# EAGLE board AS5048 Encoder (EAGLE 6.4)
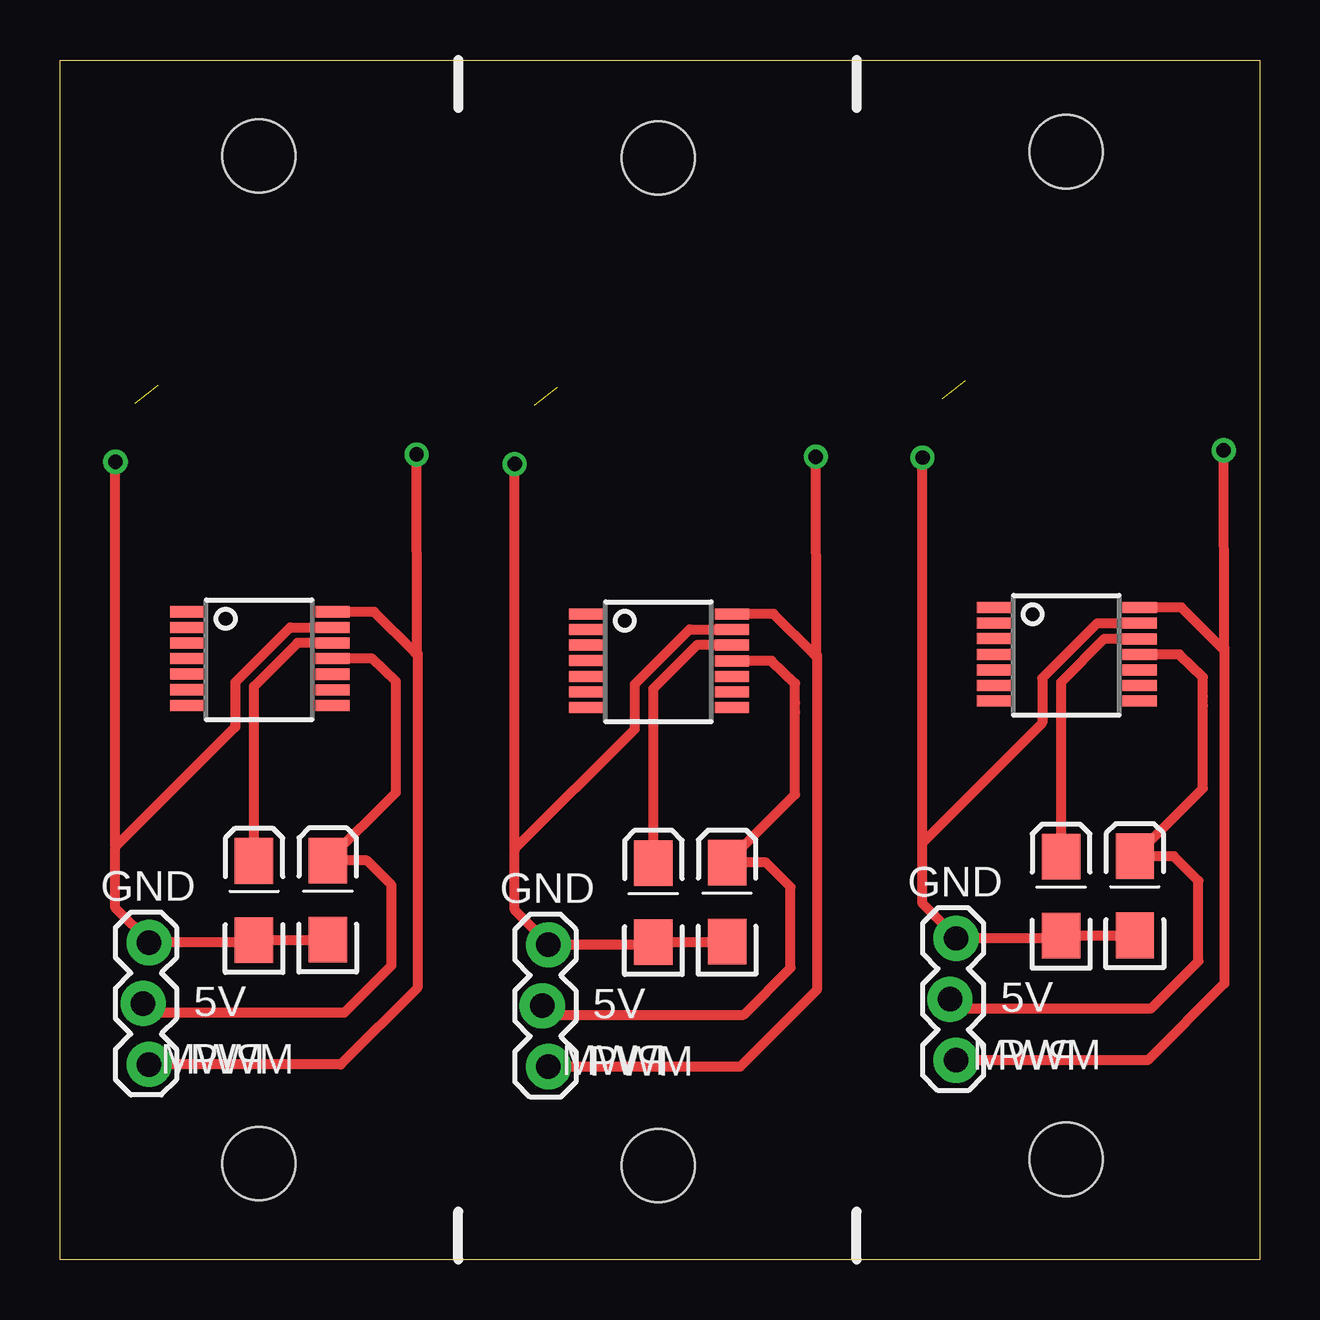
[diagram p0: board, top side]
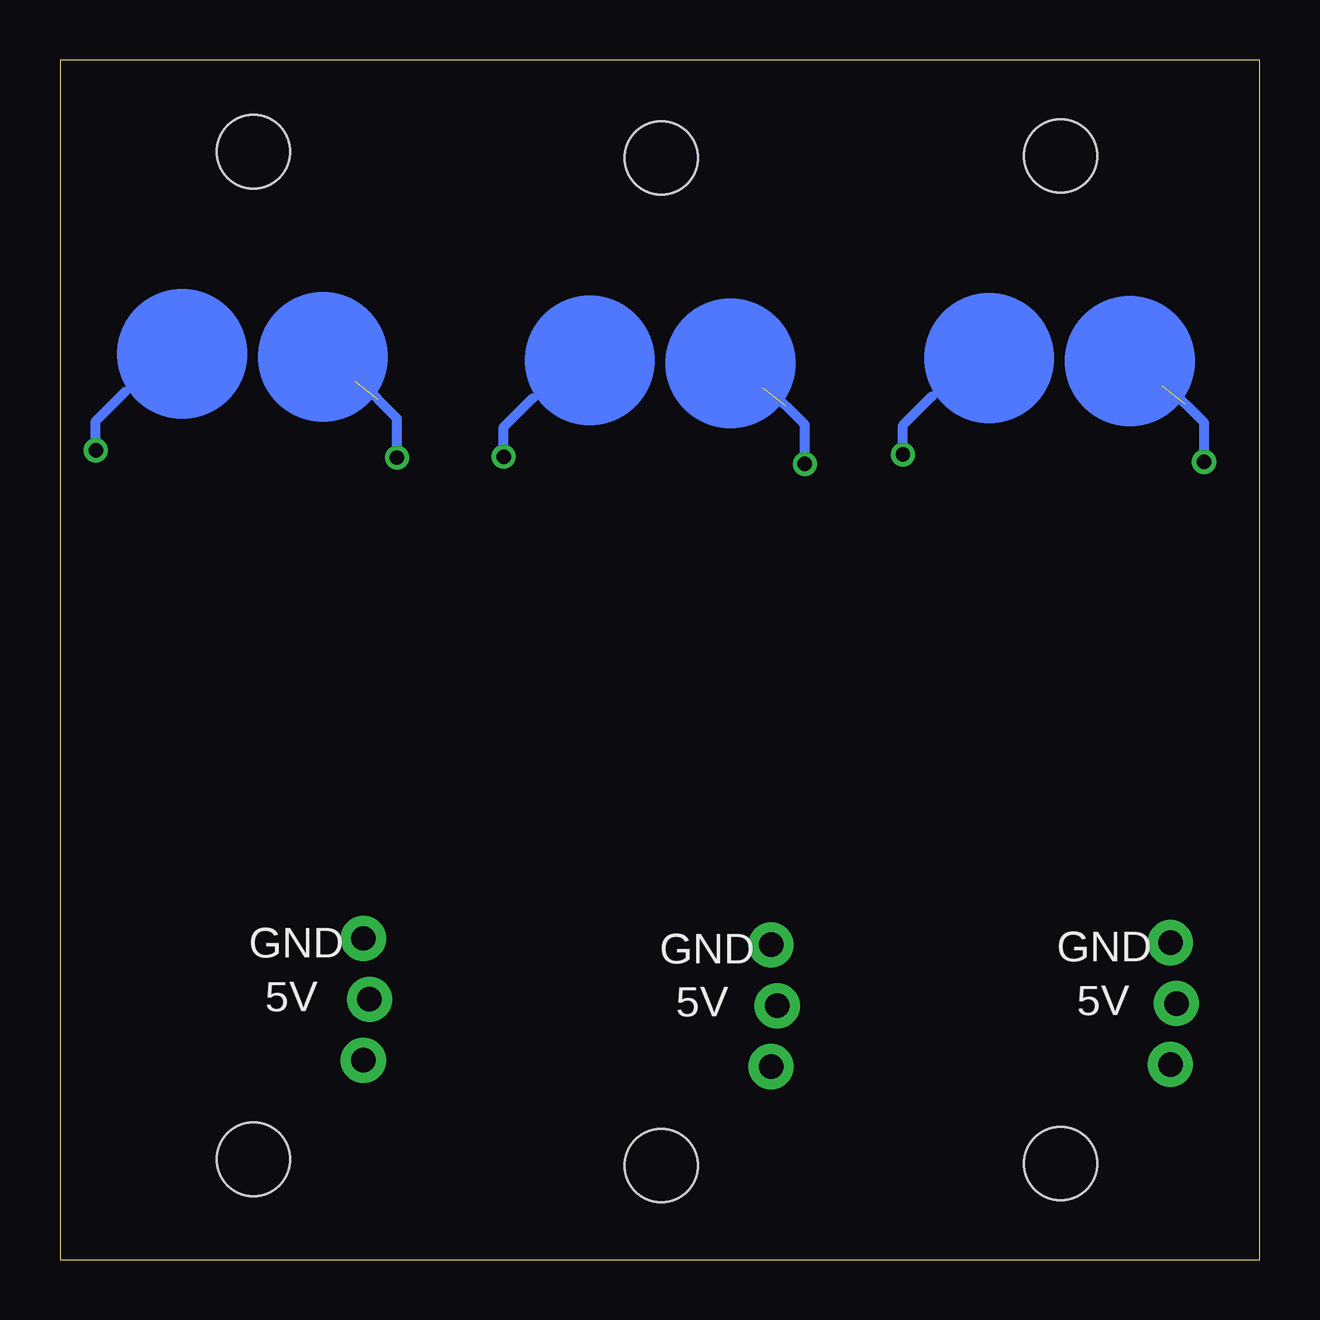
[diagram p1: board, bottom side, seen from below]

Size 50 x 50 mm. Coordinates in mm from the lower left corner, seen from the top.
Outline: 0,0 0,50 50,50 50,0 0,0
Copper layers (1*16): Top 0.035mm / dielectric 1.5mm / Bottom 0.035mm
Design rules "default": minimum track width 10mil, minimum drill 24mil, track to track 8mil, track to pad 8mil, pad to pad 8mil, via to via 8mil, smd to smd 8mil, copper to edge 40mil, drill to drill 8mil, minimum pad ring 10mil, minimum via ring 8mil, stop-mask expansion 4mil, vias tented up to drill 0mil, thermal gap 10mil

## Footprints (pad centres in the part's own frame; a part is rotated, then mirrored left to right if it is on the bottom)
EIA3216-KIT = smd 1.9 x 1.6: A 1.65,0; C -1.65,0
1X03_LOCK = drill 1.016 pad 1.88: 1 0,0.127; 2 2.54,-0.127; 3 5.08,0.127
TSOP14 = smd 0.46 x 1.43: 1 -2,-3; 2 -1.35,-3; 3 -0.7,-3; 4 -0.05,-3; 5 0.6,-3; 6 1.25,-3; 7 1.9,-3; 8 1.904,3.065; 9 1.254,3.065; 10 0.604,3.065; 11 -0.046,3.065; 12 -0.696,3.065; 13 -1.346,3.065; 14 -2,3.065
STAND-OFF-TIGHT = hole 3.048: 0,0

## Placement (x,y rotation side)
C1  100nF  [EIA3216-KIT]  27.81,14.89 90 top
C2  10uF  [EIA3216-KIT]  24.73,14.88 90 top
C3  100nF  [EIA3216-KIT]  11.16,14.98 90 top
C4  10uF  [EIA3216-KIT]  8.09,14.97 90 top
C5  100nF  [EIA3216-KIT]  44.8,15.16 90 top
C6  10uF  [EIA3216-KIT]  41.73,15.14 90 top
JP1  [1X03_LOCK]  3.59,13.21 270 top
JP2  [1X03_LOCK]  20.23,13.12 270 top
JP3  [1X03_LOCK]  37.23,13.39 270 top
U$1  AS5048  [TSOP14]  8.3,25 270 top
U$2  [STAND-OFF-TIGHT]  8.3,46 0 top
U$3  [STAND-OFF-TIGHT]  8.3,4 0 top
U$4  AS5048  [TSOP14]  24.94,24.91 270 top
U$5  [STAND-OFF-TIGHT]  24.94,45.91 0 top
U$6  [STAND-OFF-TIGHT]  24.94,3.91 0 top
U$7  AS5048  [TSOP14]  41.94,25.18 270 top
U$8  [STAND-OFF-TIGHT]  41.94,46.18 0 top
U$9  [STAND-OFF-TIGHT]  41.94,4.18 0 top

## Library data of the parts
C1-C6 = SparkFun-Passives
JP1-JP3 = SparkFun-Connectors
U$1 U$4 U$7 = austriamicrosystems
U$2 U$3 U$5 U$6 U$8 U$9 = SparkFun-Electromechanical

## Nets
3V1: C2.A U$4.12
3V2: C6.A U$7.12
3V3: C4.A U$1.12
GND: C3.C C4.C JP1.1 U$1.13
GND1: C1.C C2.C JP2.1 U$4.13
GND2: C5.C C6.C JP3.1 U$7.13
PWM: JP1.3 U$1.14
PWM1: JP2.3 U$4.14
PWM2: JP3.3 U$7.14
VCC: C3.A JP1.2 U$1.11
VCC1: C1.A JP2.2 U$4.11
VCC2: C5.A JP3.2 U$7.11

## Tracks (layer width: path | path; a pad name or v marks a point on that pad's centre or on a via)
3V1
  Top 0.406: U$4.12 26.55,25.61 26.54,25.61 24.73,23.8 C2.A
3V2
  Top 0.406: U$7.12 43.54,25.87 43.54,25.88 41.73,24.07 C6.A
3V3
  Top 0.406: U$1.12 9.9,25.7 8.09,23.89 C4.A
GND  (via drill 0.6)  (1 unrouted)
  Top 0.406: U$1.13 11.32,26.35 9.6,26.35 7.31,24.06 7.31,22.19 2.31,17.19 | 2.31,17.19 v2.31,33.25 2.31,33.34 | C3.C 8.1,13.33 C4.C 7.98,13.21 JP1.1 3.77,13.21 2.31,14.66 2.31,17.16 2.31,17.19
  Bottom 0.406: v2.31,33.25 2.31,34.88 3.86,36.43 4.07,36.43
GND1  (via drill 0.6)  (1 unrouted)
  Top 0.406: U$4.13 27.96,26.26 26.24,26.26 23.95,23.97 23.95,22.1 18.95,17.1 | 18.95,17.1 v18.95,33.16 18.95,33.25 | C1.C 24.75,13.24 C2.C 24.62,13.12 JP2.1 20.41,13.12 18.95,14.58 18.95,17.07 18.95,17.1
  Bottom 0.406: v18.95,33.16 18.95,34.8 20.5,36.34 20.71,36.34
GND2  (via drill 0.6)  (1 unrouted)
  Top 0.406: U$7.13 44.96,26.53 43.24,26.53 40.95,24.24 40.95,22.37 35.95,17.37 | 35.95,17.37 v35.95,33.43 35.95,33.52 | C5.C 41.74,13.51 C6.C 41.62,13.39 JP3.1 37.41,13.39 35.95,14.84 35.95,17.34 35.95,17.37
  Bottom 0.406: v35.95,33.43 35.95,35.06 37.5,36.61 37.71,36.61
PWM  (via drill 0.6)
  Top 0.406: 14.78,25.32 14.8,25.3 14.9,25.3 14.9,11.33 11.7,8.13 JP1.3 | 14.78,25.32 13.1,27 U$1.14 | 14.78,25.32 14.88,25.43 v14.86,33.55 14.86,33.62
  Bottom 0.406: v14.86,33.55 14.86,34.78 13.65,35.99
PWM1  (via drill 0.6)
  Top 0.406: 31.42,25.23 31.44,25.21 31.54,25.21 31.54,11.24 28.34,8.04 JP2.3 | 31.42,25.23 29.74,26.91 U$4.14 | 31.42,25.23 31.52,25.34 v31.51,33.47 31.51,33.53
  Bottom 0.406: v31.51,33.47 31.51,34.69 30.3,35.9
PWM2  (via drill 0.6)
  Top 0.406: 48.42,25.5 48.44,25.48 48.54,25.48 48.54,11.5 45.34,8.31 JP3.3 | 48.42,25.5 46.74,27.18 U$7.14 | 48.42,25.5 48.52,25.61 v48.5,33.73 48.5,33.8
  Bottom 0.406: v48.5,33.73 48.5,34.95 47.3,36.16
VCC
  Top 0.406: U$1.11 11.44,25.05 13.02,25.05 14,24.1 14,23.29 14,22.9 14,19.47 C3.A 12.79,16.63 13.81,15.61 13.81,12.25 11.86,10.29 3.84,10.29 JP1.2
VCC1
  Top 0.406: U$4.11 28.08,24.96 29.66,24.96 30.64,24.01 30.64,23.2 30.64,22.81 30.64,19.38 C1.A 29.44,16.54 30.46,15.52 30.46,12.16 28.5,10.21 20.48,10.21 JP2.2
VCC2
  Top 0.406: U$7.11 45.08,25.22 46.66,25.22 47.64,24.28 47.64,23.47 47.64,23.08 47.64,19.64 C5.A 46.44,16.81 47.45,15.79 47.45,12.43 45.5,10.47 37.48,10.47 JP3.2
(copper drawn outside any net)
  shapes: Bottom circle x6

## Text on the board
tNames: GND | GND | GND | 5V | 5V | 5V | PWM | PWM | PWM | PWM | PWM | PWM
bNames: GND | GND | GND | 5V | 5V | 5V